# Altium PCB CDH_PCB_reva01.PcbDoc (part 1 of 2)
Units mil, origin at the board's own origin, x right, y up, seen from the top; angles counter-clockwise.
Board outline 4760 x 6365 mil, 4 copper layers (Component Side, Ground Plane, Power Plane, Solder Side), stack 60.8 mil thick; 111 components, 99 nets, 581 pads, 205 vias.
Unrouted connection lines stored in the file: 7.
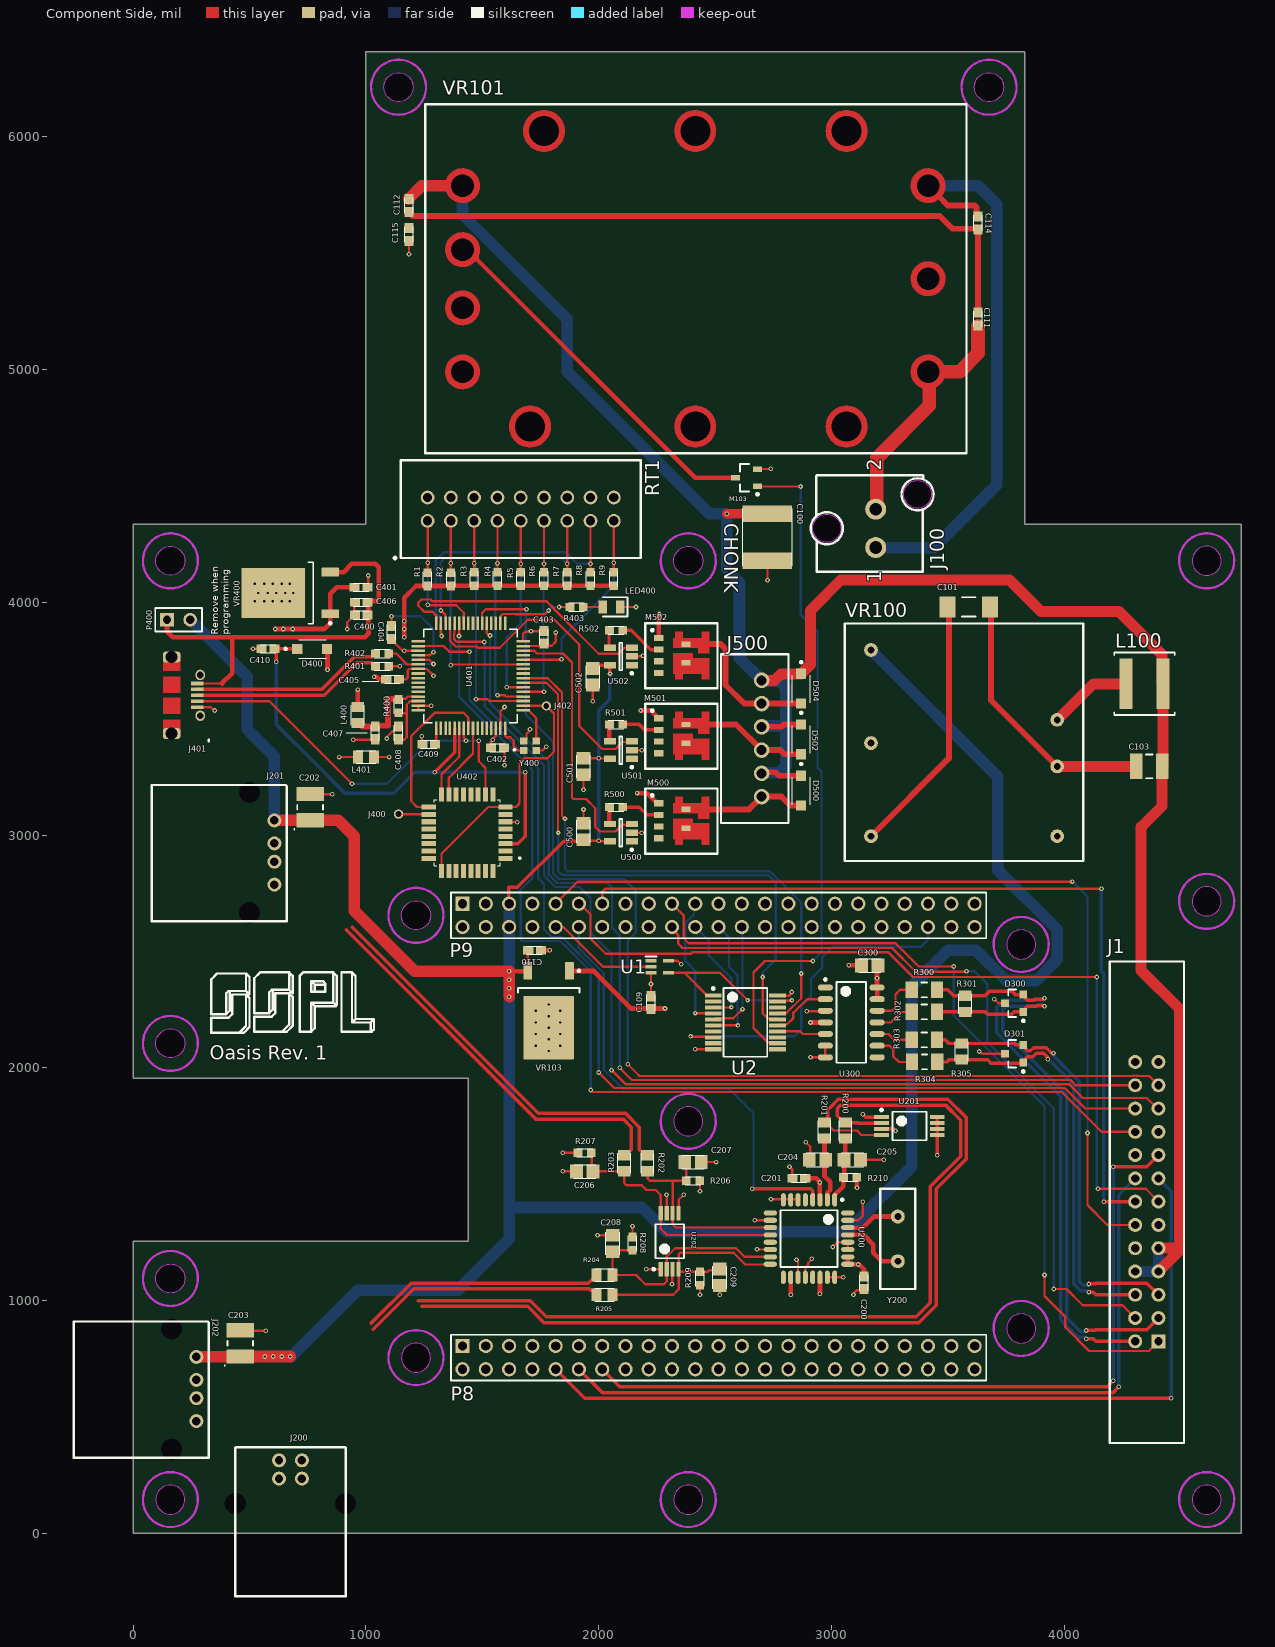
[diagram p0: Component Side view]
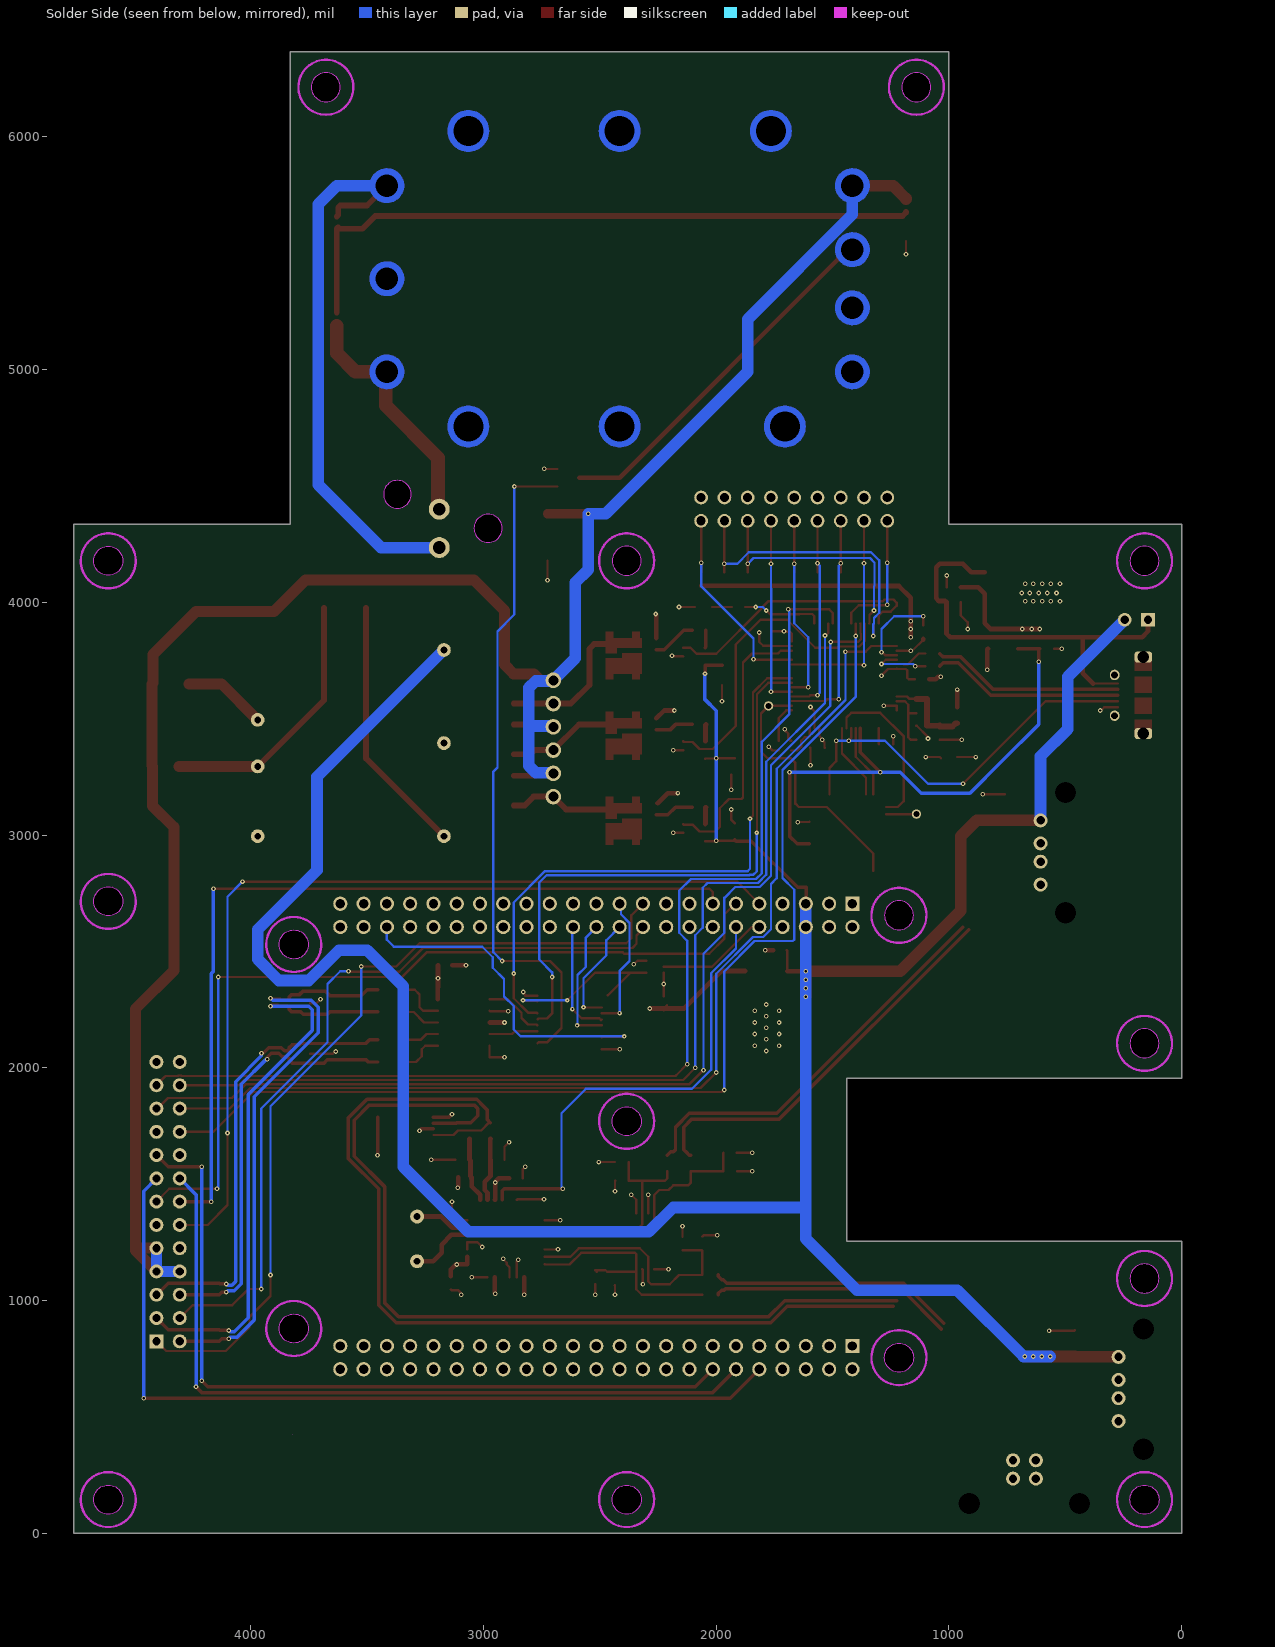
[diagram p1: Solder Side view, seen from below]
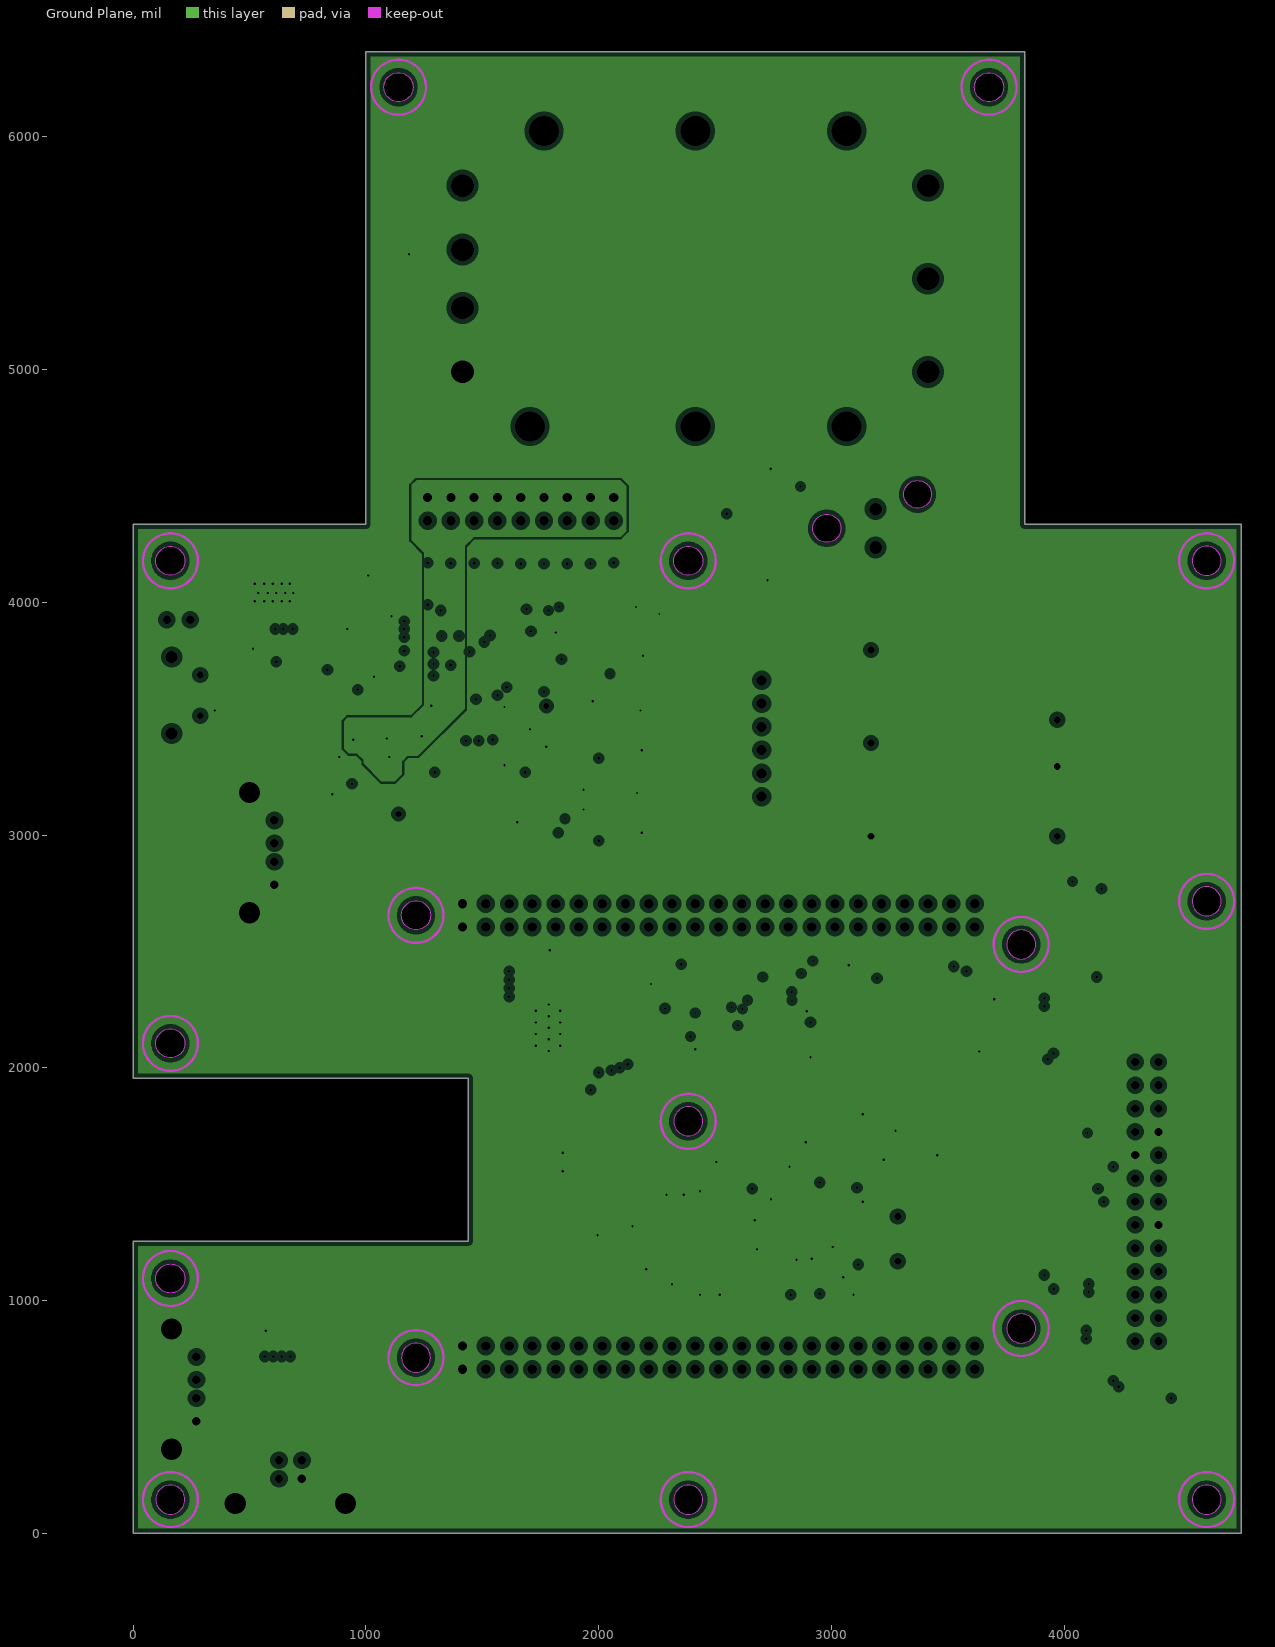
[diagram p2: Ground Plane, clearances drawn from the general rule]
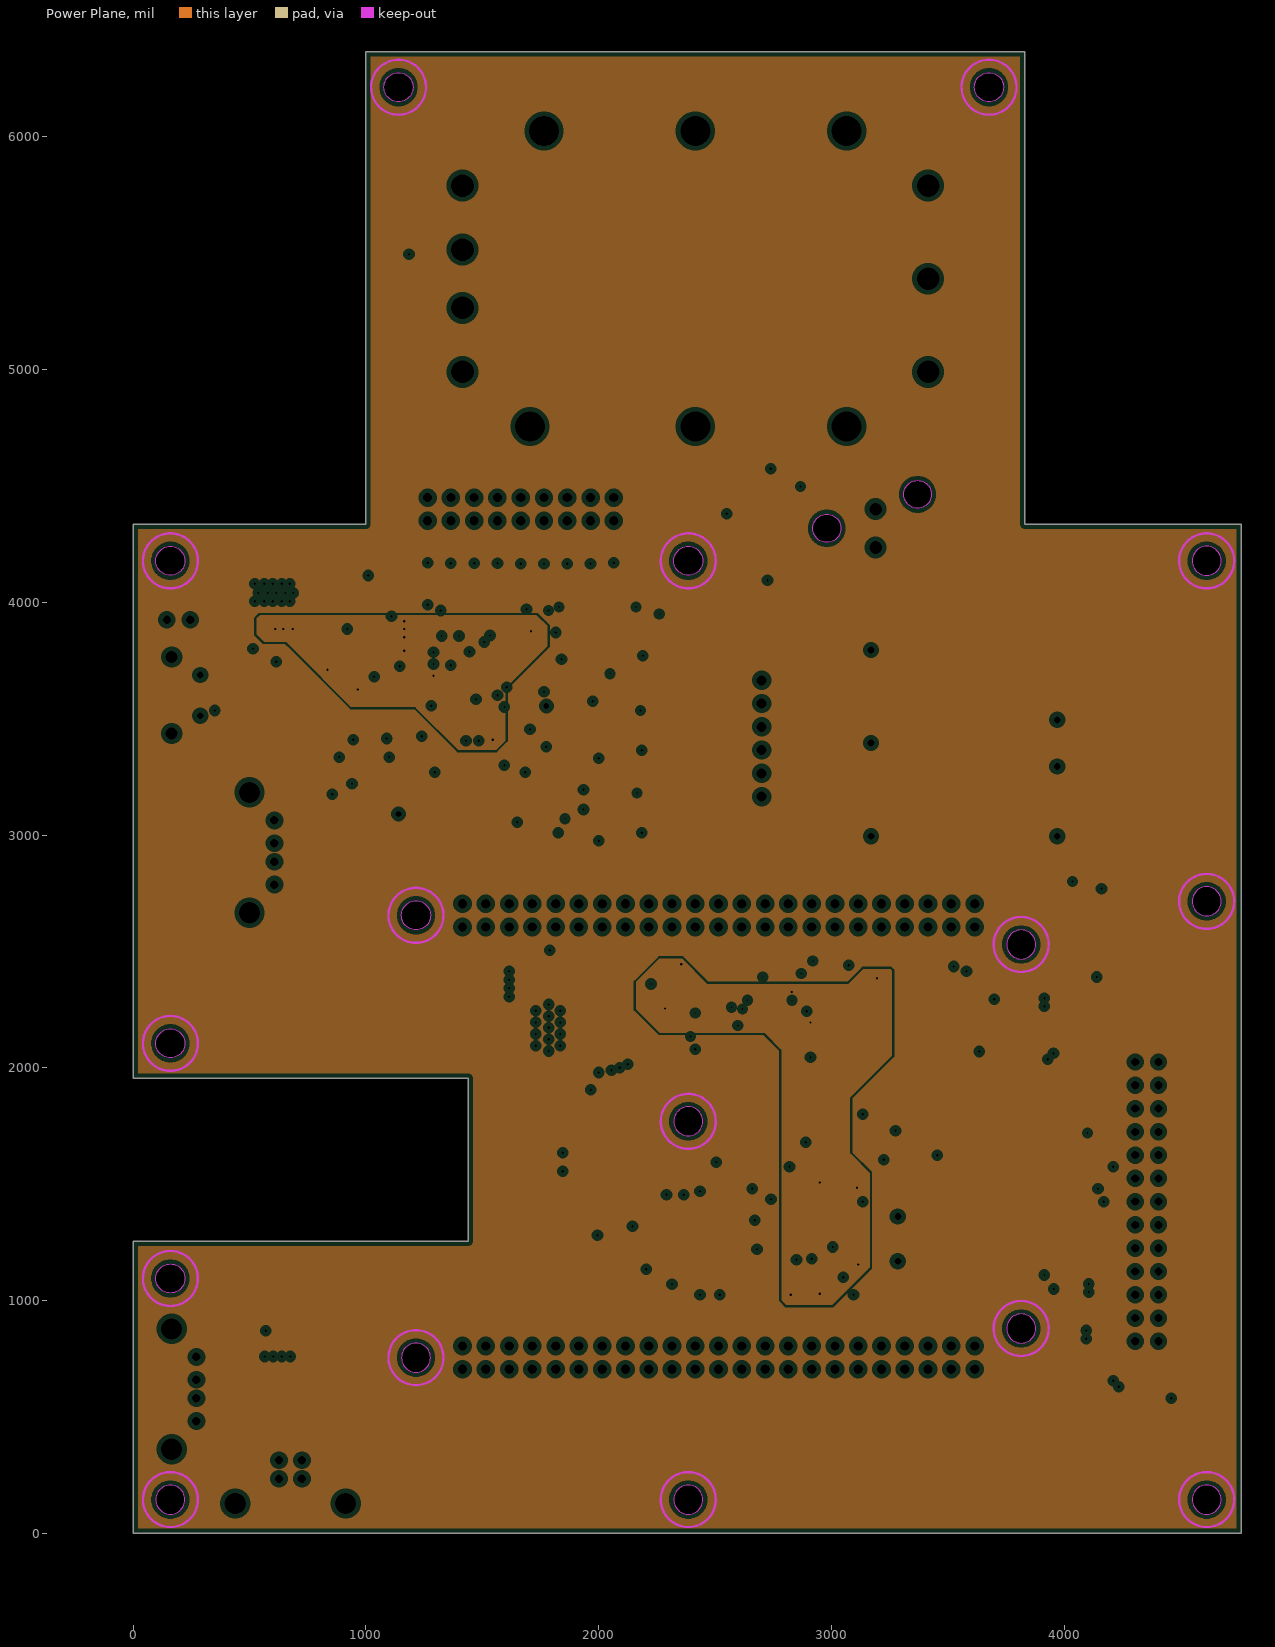
[diagram p3: Power Plane, clearances drawn from the general rule]
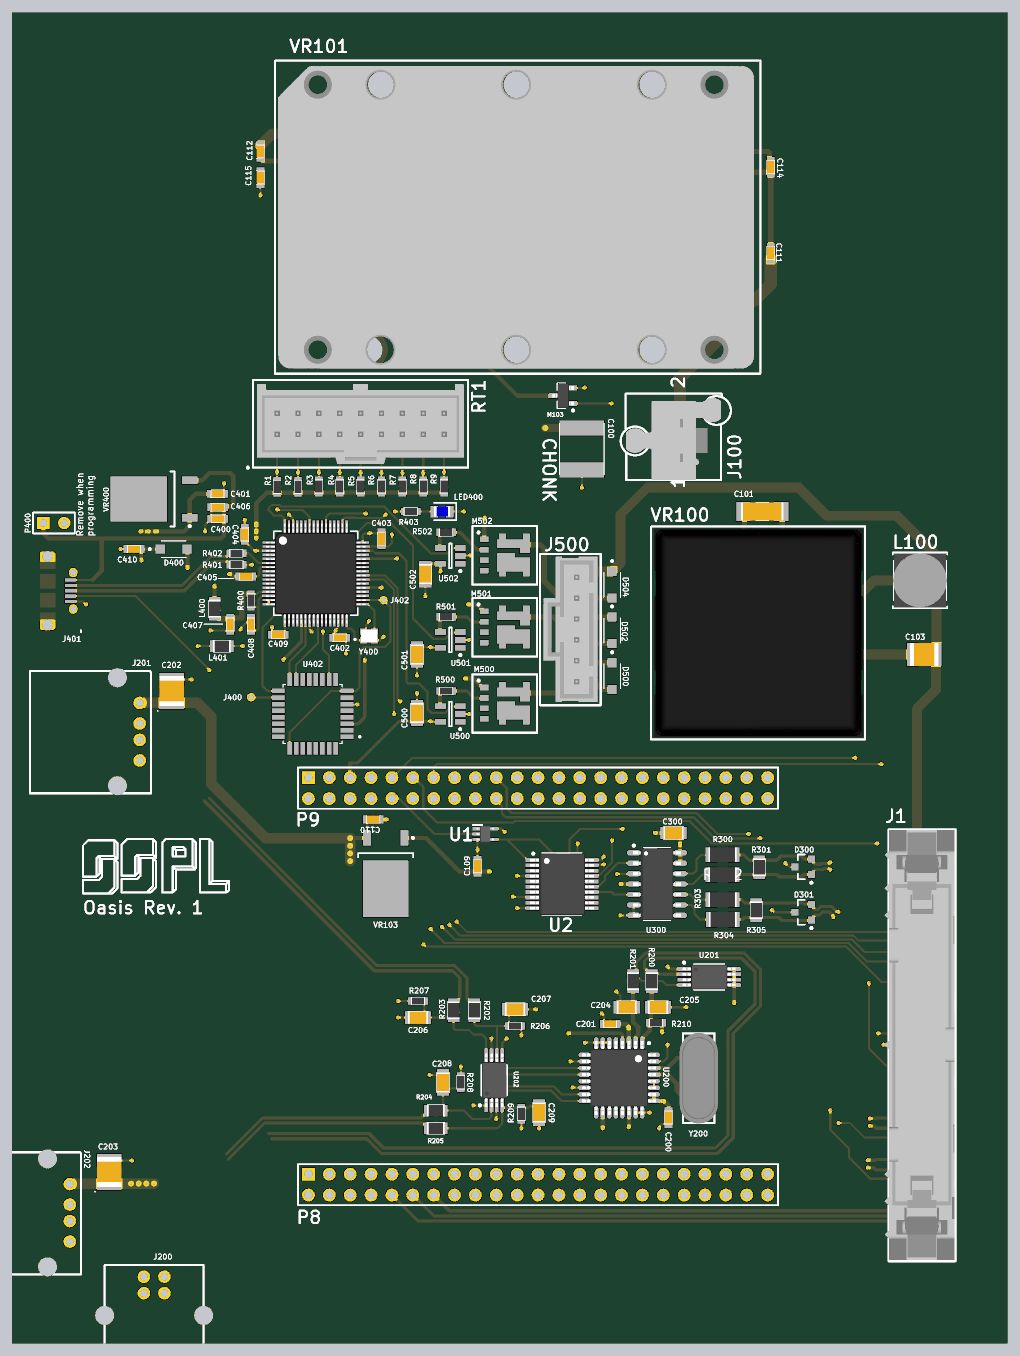
[diagram p5: 3D render of the assembled board from above, using the file's embedded part models]

## Layer stack, top to bottom
Top Solder: solder mask 0.4, Solder Resist, Dk 3.5
Component Side: signal copper 1.4
Dielectric 1: core 7.6, FR-4, Dk 4.8
Ground Plane: plane copper 1.4, net (Multiple Nets)
Dielectric 3: prepreg 40, Dk 4.2
Power Plane: plane copper 1.4, net (Multiple Nets)
Dielectric 4: core 7.6, FR-4, Dk 4.8
Solder Side: signal copper 1.4
Bottom Solder: solder mask 0.4, Solder Resist, Dk 3.5

## Board outline
0,0 0,1255 1440,1255 1440,1955 0,1955 0,4335 1000,4335 1000,6365 3830,6365 3830,4335 4760,4335 4760,0
cut-out: 1140,6150.5 cw(c1140,6213) 1077.5,6213 cw(c1140,6213) 1140,6275.5 cw(c1140,6213) 1202.5,6213 cw(c1140,6213)
cut-out: 3677,6150.5 cw(c3677,6213) 3614.5,6213 cw(c3677,6213) 3677,6275.5 cw(c3677,6213) 3739.5,6213 cw(c3677,6213)
cut-out: 4549.5,4178 ccw(c4612,4178) 4612,4115.5 ccw(c4612,4178) 4674.5,4178 ccw(c4612,4178) 4612,4240.5 ccw(c4612,4178)
cut-out: 2385,4115.5 cw(c2385,4178) 2322.5,4178 cw(c2385,4178) 2385,4240.5 cw(c2385,4178) 2447.5,4178 cw(c2385,4178)
cut-out: 160,4115.5 cw(c160,4178) 97.5,4178 cw(c160,4178) 160,4240.5 cw(c160,4178) 222.5,4178 cw(c160,4178)
cut-out: 1215,2592.5 cw(c1215,2655) 1152.5,2655 cw(c1215,2655) 1215,2717.5 cw(c1215,2655) 1277.5,2655 cw(c1215,2655)
cut-out: 160,2042.5 cw(c160,2105) 97.5,2105 cw(c160,2105) 160,2167.5 cw(c160,2105) 222.5,2105 cw(c160,2105)
cut-out: 2322.5,1770 ccw(c2385,1770) 2385,1707.5 ccw(c2385,1770) 2447.5,1770 ccw(c2385,1770) 2385,1832.5 ccw(c2385,1770)
cut-out: 4549.5,2715 ccw(c4612,2715) 4612,2652.5 ccw(c4612,2715) 4674.5,2715 ccw(c4612,2715) 4612,2777.5 ccw(c4612,2715)
cut-out: 3752.5,2530 ccw(c3815,2530) 3815,2467.5 ccw(c3815,2530) 3877.5,2530 ccw(c3815,2530) 3815,2592.5 ccw(c3815,2530)
cut-out: 3752.5,880 ccw(c3815,880) 3815,817.5 ccw(c3815,880) 3877.5,880 ccw(c3815,880) 3815,942.5 ccw(c3815,880)
cut-out: 4549.5,145 ccw(c4612,145) 4612,82.5 ccw(c4612,145) 4674.5,145 ccw(c4612,145) 4612,207.5 ccw(c4612,145)
cut-out: 2322.5,145 ccw(c2385,145) 2385,82.5 ccw(c2385,145) 2447.5,145 ccw(c2385,145) 2385,207.5 ccw(c2385,145)
cut-out: 1152.5,755 ccw(c1215,755) 1215,692.5 ccw(c1215,755) 1277.5,755 ccw(c1215,755) 1215,817.5 ccw(c1215,755)
cut-out: 160,1032.5 cw(c160,1095) 97.5,1095 cw(c160,1095) 160,1157.5 cw(c160,1095) 222.5,1095 cw(c160,1095)
cut-out: 97.5,145 ccw(c160,145) 160,82.5 ccw(c160,145) 222.5,145 ccw(c160,145) 160,207.5 ccw(c160,145)
cut-out: 3310.49,4464 cw(c3370,4464) 3370,4523.51 cw(c3370,4464) 3429.51,4464 cw(c3370,4464) 3370,4404.49 cw(c3370,4464)
cut-out: 2919.1,4318 cw(c2980,4318) 2980,4378.9 cw(c2980,4318) 3040.9,4318 cw(c2980,4318) 2980,4257.1 cw(c2980,4318)
cut-out: 4595,2777.5
cut-out: 3820,425

## Design rules (kind name [scope] priority, off if disabled: settings)
Clearance [All] p1: gap=7 ignorepadtopadclearanceinfootprint=TRUE except(0: Arc-Hole Track-Hole SMDPad-Hole THPad-Hole Via-Hole Fill-Hole Poly-Hole Region-Hole Text-Hole)
DiffPairsRouting [All] p1: maxlimit=10 minlimit=10 mostfreqgap=10 toplayer_minwidth=10 toplayer_maxwidth=15 toplayer_prefwidth=15 bottomlayer_minwidth=10 bottomlayer_maxwidth=15 bottomlayer_prefwidth=15 maxuncoupledlength=500
Height [All] p1: minheight=0 maxheight=1500 prefheight=500
MatchedLengths MatchedLengths_USB_DiffPairs [All] p1: tolerance=150 checknetsindiffpair=TRUE checkdiffpairvsdiffpair=FALSE checkxsignals=FALSE checkothers=FALSE
MaxMinImpedance "Schematic Impedance Constraint_11" [InNet('RS422-Rx_P')] p1: minimum=90.00 maximum=110.0
MaxMinImpedance "Schematic Impedance Constraint_10" [InNet('RS422-Rx_N')] p2: minimum=90.00 maximum=110.0
MaxMinImpedance "Schematic Impedance Constraint_9" [InNet('RS422-Tx_P')] p3: minimum=90.00 maximum=110.0
MaxMinImpedance "Schematic Impedance Constraint_8" [InNet('RS422-Tx_N')] p4: minimum=90.00 maximum=110.0
MaxMinImpedance "Schematic Impedance Constraint_7" [InNet('USB_1_P')] p5: minimum=40.50 maximum=49.50
MaxMinImpedance "Schematic Impedance Constraint_6" [InNet('USB_1_N')] p6: minimum=40.50 maximum=49.50
MaxMinImpedance "Schematic Impedance Constraint_5" [InNet('USB_2_P')] p7: minimum=40.50 maximum=49.50
MaxMinImpedance "Schematic Impedance Constraint_4" [InNet('USB_0_N')] p8: minimum=40.50 maximum=49.50
MaxMinImpedance "Schematic Impedance Constraint_3" [InNet('TEENSY_USB_P')] p9: minimum=40.50 maximum=49.50
MaxMinImpedance "Schematic Impedance Constraint_2" [InNet('TEENSY_USB_N')] p10: minimum=40.50 maximum=49.50
MaxMinImpedance "Schematic Impedance Constraint_1" [InNet('USB_2_N')] p11: minimum=40.50 maximum=49.50
MaxMinImpedance "Schematic Impedance Constraint" [InNet('USB_0_P')] p12: minimum=40.50 maximum=49.50
MinimumAnnularRing [All] p1: minimumring=5
MinimumSolderMaskSliver [All] p1: minsoldermaskwidth=1
PlaneClearance [All] p1: clearance=20
PlaneConnect [All] p1: pad.planeconnectstyle=Relief pad.reliefexpansion=20 pad.reliefentries=4 pad.reliefconductorwidth=10 pad.reliefairgap=10 via.planeconnectstyle=Direct via.reliefexpansion=20 via.reliefentries=4 via.reliefconductorwidth=10 via.reliefairgap=10
PolygonConnect [All] p1: connectstyle=Relief reliefconductorwidth=10 reliefentries=4 polygonreliefangle="90 Angle" airgapwidth=10
RoutingVias [All] p1: holewidth=8 width=20 viastyle="Through Hole" minholewidth=8 minwidth=20 maxholewidth=8 maxwidth=20
SilkToSilkClearance [All] p1: silktosilkclearance=1
SilkToSolderMaskClearance [IsPad] p1: minsilkscreentomaskgap=0 clearancetoexposedcopper=TRUE
SolderMaskExpansion [All] p1: expansion=4 istentingtop=FALSE
Width "Schematic Width Constraint" [InNet('GND_48V')] p1: maxlimit=100 minlimit=59 preferedwidth=60 minimp=50.000000 maximp=50.000000 favimp=50.000000
Width [All] p2: maxlimit=100 minlimit=10 preferedwidth=10
23 further rules are at their usual default settings.

## Classes and differential pairs
net class 500_HEATERS_Nets: +5 +28 GND NetD500_2 NetD502_2 NetD504_2 NetM500_4 NetM500_G1 NetM501_4 NetM501_G1 NetM502_4 NetM502_G1 NetR500_1 NetR501_1 NetR502_1 NetU401_46 NetU401_61 NetU401_64 NetU500_1 NetU501_1 NetU502_1
component class 500_HEATERS: C500 C501 C502 D500 D502 D504 J500 M500 M501 M502 R500 R501 R502 U500 U501 U502
net class 400_TEENSY_Nets: +5 GND NetC400_1 NetC407_1 NetC407_2 NetC408_1 NetC409_2 NetC410_1 NetJ1_20 NetJ1_21 NetJ1_22 NetJ1_23 NetJ1_24 NetJ400_1 NetJ401_4 NetJ402_1 NetLED400_2 NetR1_1 NetR2_1 NetR3_1 NetR4_1 NetR5_2 NetR6_1 NetR7_1 NetR8_1 NetR9_1 NetR401_1 NetR402_1 NetR403_2 NetU2_16 NetU2_17 NetU401_22 NetU401_24 NetU401_25 NetU401_32 NetU401_33 NetU401_46 NetU401_61 NetU401_64 TEENSY_USB_N TEENSY_USB_P TN_3V3
net class 300_CDH_RS422_Nets: 3V3 GND NetR300_1 NetR302_1 NetR303_1 NetR304_1 NetU2_14 NetU2_15 RS422-Rx_N RS422-Rx_P RS422-Tx_N RS422-Tx_P
net class 200_CDH_USB_2_Hub_Nets: 3V3 +5 GND NetC204_1 NetC205_1 NetC206_1 NetC207_1 NetC208_2 NetC209_2 NetP9_12 NetU200_29 NetU200_30 USB_0_N USB_0_P USB_1_N USB_1_P USB_2_N USB_2_P
net class 100_POWER_Nets: 3V3 +5 +28 +48 GND GND_48V GND_BASEPLATE NetL100_2 NetM103_1 NetM103_3
net class 000_BBB_Pinouts_Nets: 3V3 +5 +28 GND NetC407_2 NetJ1_1 NetJ1_4 NetJ1_12 NetJ1_13 NetJ1_14 NetJ1_15 NetJ1_16 NetJ1_17 NetJ1_20 NetJ1_21 NetJ1_22 NetJ1_23 NetJ1_24 NetM103_1 NetP9_10 NetP9_12 NetP9_21 NetP9_22 NetP9_24 NetP9_26 NetP9_42 NetR1_1 NetR2_1 NetR3_1 NetR4_1 NetR5_2 NetR6_1 NetR7_1 NetR8_1 NetR9_1 NetU1_4 NetU2_14 NetU2_15 NetU2_16 NetU2_17 RS422-Rx_N RS422-Rx_P RS422-Tx_N RS422-Tx_P TN_3V3
component class 400_TEENSY: C400 C401 C402 C403 C404 C405 C406 C407 C408 C409 C410 D400 J400 J401 J402 L400 L401 LED400 P400 R400 R401 R402 R403 U401 U402 VR400 Y400
component class 100_POWER: C100 C101 C103 C109 C110 C111 C112 C114 C115 J100 L100 M103 VR100 VR101 VR103
component class 300_CDH_RS422: * C300 D300 D301 R300 R301 R302 R303 R304 R305 U300
component class 200_CDH_USB_2_Hub: C200 C201 C202 C203 C204 C205 C206 C207 C208 C209 J200 J201 J202 R200 R201 R202 R203 R204 R205 R206 R207 R208 R209 R210 U200 U201 U202 Y200
component class 000_BBB_Pinouts: J1 P8 P9 R1 R2 R3 R4 R5 R6 R7 R8 R9 RT1 U1 U2
differential pair USB_0: +USB_0_P -USB_0_N
differential pair USB_2: +USB_2_P -USB_2_N
differential pair USB_1: +USB_1_P -USB_1_N
differential pair TEENSY_USB: +TEENSY_USB_P -TEENSY_USB_N
differential pair RS422-Tx: +RS422-Tx_P -RS422-Tx_N
differential pair RS422-Rx: +RS422-Rx_P -RS422-Rx_N

## Components (designator, comment, footprint, x,y, rotation, side; value= is the part's Value field where it differs from the comment)
C100 "0.2uF Capactor, high voltage" CAA572C0G2J204J640LH 2730,4279.61 r90 top value=0.2uF
C101 "680pF Cap" Imperial1808_CAP 3590,3980 r180 top value=680pF
C103 "10uF Capacitor" Imperial1210_Cap 4365,3295 r0 top value=10uF
C109 "1 uF Capacitor" IMPERIAL0603_Capacitor 2225,2280 r270 top value=1uF
C110 "1 uF Capacitor" IMPERIAL0603_Capacitor 1725,2505 r180 top value=1uF
C111 "4.7nF Capacitor" IMPERIAL0603_Capacitor 3630,5217.56 r90 top value=4.7nF
C112 "4.7nF Capacitor" IMPERIAL0603_Capacitor 1185,5705 r270 top value=4.7nF
C114 "4.7nF Capacitor" IMPERIAL0603_Capacitor 3630,5630 r90 top value=4.7nF
C115 "4.7nF Capacitor" IMPERIAL0603_Capacitor 1185,5580 r90 top value=4.7nF
C200 "100pF Capacitor" IMPERIAL0603_Capacitor 3140,1076.46 r90 top value=100pF
C201 "100pF Capacitor" IMPERIAL0603_Capacitor 2860,1525 r180 top value=100pF
C202 "F910J107MBAAJ6" POLAR_CAP_SMD_EIA2010 760,3120 r90 top value=100uF
C203 "F910J107MBAAJ6" POLAR_CAP_SMD_EIA2010 460,816.1 r90 top value=100uF
C204 "22pF capacitor" IMPERIAL0805_CAPACITOR 2940,1605 r180 top value=22pF
C205 "22pF capacitor" IMPERIAL0805_CAPACITOR 3090,1605 r0 top value=22pF
C206 "22pF capacitor" IMPERIAL0805_CAPACITOR 1940,1555 r180 top value=22pF
C207 "22pF capacitor" IMPERIAL0805_CAPACITOR 2405,1595 r0 top value=22pF
C208 "22pF capacitor" IMPERIAL0805_CAPACITOR 2060,1245 r270 top value=22pF
C209 "22pF capacitor" IMPERIAL0805_CAPACITOR 2520,1100 r90 top value=22pF
C300 "0.2uF Capacitor" IMPERIAL0805_CAPACITOR 3164.49,2440 r180 top value=0.2uF
C400 "2.2uF Capacitor" IMPERIAL0603_Capacitor 980,3945 r180 top value=2.2uF
C401 "2.2uF Capacitor" IMPERIAL0603_Capacitor 979.29,4065 r0 top value=2.2uF
C402 "2.2uF Capacitor" IMPERIAL0603_Capacitor 1565,3375 r0 top value=2.2uF
C403 "0.1uF Capactor" IMPERIAL0603_Capacitor 1765,3850 r270 top value=0.1uF
C404 "0.1uF Capactor" IMPERIAL0603_Capacitor 1110,3870 r90 top value=0.1uF
C405 "0.1uF Capactor" IMPERIAL0603_Capacitor 1115,3669 r180 top value=0.1uF
C406 "2.2uF Capacitor" IMPERIAL0603_Capacitor 980,4000 r180 top value=2.2uF
C407 "2.2uF Capacitor" IMPERIAL0603_Capacitor 1040,3439 r270 top value=2.2uF
C408 "0.1uF Capactor" IMPERIAL0603_Capacitor 1140,3439 r90 top value=0.1uF
C409 "0.1uF Capactor" IMPERIAL0603_Capacitor 1270,3390 r0 top value=0.1uF
C410 "0.1uF Capactor" IMPERIAL0603_Capacitor 579.29,3800 r180 top value=0.1uF
C500 "10uF Capacitor" IMPERIAL0805_CAPACITOR 1935,3015 r270 top value=10uF
C501 "10uF Capacitor" IMPERIAL0805_CAPACITOR 1935,3294.57 r90 top value=10uF
C502 "10uF Capacitor" IMPERIAL0805_CAPACITOR 1975,3680 r90 top value=10uF
D300 "CDSOT23-SM712" BOUR-SOT23-3_V 3785,2277.4 r180 top
D301 "CDSOT23-SM712" BOUR-SOT23-3_V 3785,2060 r180 top
D400 "STPS1L40ZF" *SODFL3718X108N 769.76,3800 r0 top
D500 "STPS1L40ZF" *SODFL3718X108N 2870,3190.24 r270 top
D502 "STPS1L40ZF" *SODFL3718X108N 2870,3410 r270 top
D504 "STPS1L40ZF" *SODFL3718X108N 2870,3627.99 r270 top
J1 "TE_5499922-6" TE_5499922-6 4355,1425 r90 top
J100 "LaserHeader" "MOLEX 2X1 LATCH HEADER" 3190,4235 r90 top
J200 "USB_B_FEMALE" USB_B_FEMALE_RT 675.79,235 r0 top
J201 "USB_A_FEMALE" USB_A_FEMALE_SINGLE 500,2925 r270 top
J202 "USB_A_FEMALE" USB_A_FEMALE_SINGLE 165,620 r270 top
J400 "Prog. Pad" PAD_40x25 1140,3090 r0 top value=DNI
J401 "" uUSB_Padsonly 61.57,3800.28 r270 top value=DNI
J402 "Reset Pad" PAD_40x25 1775,3555 r90 top value=DNI
J500 "Molex 171971-0006" "MOLEX 6x1 latch header" 2800.39,3066.58 r90 top
L100 "1.1uH Inductor" XAL6020-112ME_ 4345,3650 r180 top value="1.1 uH"
L400 "Ferritde, 600 Ohm Impedence" Imperial0805_RES 965,3515 r90 top value="600 Ohm"
L401 "Ferritde, 600 Ohm Impedence" Imperial0805_RES 1000,3335 r180 top value="600 Ohm"
LED400 "SML-211DTT86" LEDC2012X90N 2055,3980 r180 top
M103 "BSS138LT7G" SOT95P245X110-3N 2635,4535 r180 top
M500 "NPN MOSFET" "PowerPAK SO-8L DUAL ASYMMETRIC" 2200.39,3200.08 r270 top
M501 "NPN MOSFET" "PowerPAK SO-8L DUAL ASYMMETRIC" 2200.39,3564.76 r270 top
M502 "NPN MOSFET" "PowerPAK SO-8L DUAL ASYMMETRIC" 2200.39,3910.08 r270 top
P8 "FEMALE HEADER 2x23" MAJOR-TSHC-123-D-03_V_FLIPPED 2515,755 r0 top locked
P9 "FEMALE HEADER 2x23" MAJOR-TSHC-123-D-03_V_FLIPPED 2515,2655 r0 top locked
P400 "Header 2" HDR1X2 145,3925 r0 top
R1 "10K Resistor" Imperial0603_RES 1265,4098.54 r270 top value=10K
R2 "10K Resistor" Imperial0603_RES 1365,4098.54 r270 top value=10K
R3 "10K Resistor" Imperial0603_RES 1465,4100 r270 top value=10K
R4 "10K Resistor" Imperial0603_RES 1565,4100 r270 top value=10K
R5 "10K Resistor" Imperial0603_RES 1665,4100 r90 top value=10K
R6 "10K Resistor" Imperial0603_RES 1765,4100 r270 top value=10K
R7 "10K Resistor" Imperial0603_RES 1865,4100 r270 top value=10K
R8 "10K Resistor" Imperial0603_RES 1965,4100 r270 top value=10K
R9 "10K Resistor" Imperial0603_RES 2065,4100 r270 top value=10K
R200 "27 Ohm Resistor" Imperial0805_RES 3060,1730 r270 top value=27
R201 "27 Ohm Resistor" Imperial0805_RES 2970,1730 r270 top value=27
R202 "27 Ohm Resistor" Imperial0805_RES 2210,1590 r90 top value=27
R203 "27 Ohm Resistor" Imperial0805_RES 2110,1590 r90 top value=27
R204 "27 Ohm Resistor" Imperial0805_RES 2025,1110 r180 top value=27
R205 "27 Ohm Resistor" Imperial0805_RES 2025,1025 r180 top value=27
R206 "15KOhm Resistor" Imperial0603_RES 2405,1515 r0 top value=15K
R207 "15KOhm Resistor" Imperial0603_RES 1940,1635 r180 top value=15K
R208 "15KOhm Resistor" Imperial0603_RES 2145,1245 r270 top value=15K
R209 "15KOhm Resistor" Imperial0603_RES 2435,1095 r90 top value=15K
R210 "1.5KOhm Resistor" Imperial0603_RES 3080,1530 r0 top value=1.5K
R300 "10 Ohm Resistor" Imperial1206_RES 3399.13,2335 r0 top value=10
R301 "100 Ohm Resistor" Imperial0805_RES 3575,2275 r270 top value=100
R302 "10 Ohm Resistor" Imperial1206_RES 3399.13,2240 r0 top value=10
R303 "10 Ohm Resistor" Imperial1206_RES 3399.13,2120 r0 top value=10
R304 "10 Ohm Resistor" Imperial1206_RES 3400,2025 r0 top value=10
R305 "100 Ohm Resistor" Imperial0805_RES 3560,2070 r90 top value=100
R400 "470 Ohm Resistor" Imperial0603_RES 1140,3554 r90 top value=470
R401 "33 Ohm Resistor" Imperial0603_RES 1070,3725 r180 top value=33
R402 "33 Ohm Resistor" Imperial0603_RES 1070,3780 r180 top value=33
R403 "470 Ohm Resistor" Imperial0603_RES 1905,3980 r180 top value=470
R500 "CRCW0603100RFKEAC" Imperial0603_RES 2075,3120 r0 top value=100
R501 "CRCW0603100RFKEAC" Imperial0603_RES 2075,3475 r0 top value=100
R502 "CRCW0603100RFKEAC" Imperial0603_RES 2075,3880 r0 top value=100
RT1 "Thermisters" "MOLEX 90130-1118" 1265,4350 r0 top
U1 "single gate inverter" SOT65P210X110-5N 2262.6,2434.41 r0 top
U2 "Tristate buffer" SOP65P780X200-20N 2630,2195 r0 top
U200 "TUSB2046B_VF_32" TQFP80P900X900X160-32N 2903.74,1266.34 r270 top value=Value
U201 "SN65240PWR" PW0008A_M 3335,1750 r0 top
U202 "SN65240PWR" PW0008A_M 2305,1255 r90 top
U300 "SN65HVD1470D" SOIC127P590X175-14M 3085,2195 r0 top
U401 "MK20DX256VLH7" *QFP50P1200X1200X160-64N 1450,3684 r0 top
U402 "MKL04Z32" *QFP80P900X900X160-32N 1435,3010 r180 top
U500 "LTC1981ES5#TRMPBF" LT-S5-5-SOT-23_M 2095,3010 r180 top
U501 "LTC1981ES5#TRMPBF" LT-S5-5-SOT-23_M 2095,3365 r180 top
U502 "LTC1981ES5#TRMPBF" LT-S5-5-SOT-23_M 2095,3767.4 r180 top
VR100 "28 to 5V switching converter" "THN 30-2411WI-A1" 3570,3395 r270 top locked
VR101 "V24C28C50BL" V24C48C50BL_tht 3555,4665 r90 top locked
VR103 "LP38691DT-3.3/NOPB" NDP0003B_N 1785,2245 r270 top
VR400 "LP38691DT-3.3/NOPB" NDP0003B_N 675,4040 r180 top
Y200 "ATS060C-E" "HC-49/US T/H Crystal" 3285,1265 r270 top
Y400 "ECS-160-10-37-JTN-TR" XTAL_ECS-160-10-37-RWM-TR 1705,3384 r0 top

## Footprints (in the part's own frame and the unit in brackets; to place one, negate y for a bottom-side part, rotate by r counter-clockwise, add the part's x,y. Pads: shape width x height; smd on the part's side, far side on the other; paste and mask are expansions set on the pad)
*QFP50P1200X1200X160-64N [mil]
  rect 58x11 smd: 1(-225,148) 2(-225,128) 3(-225,108) 4(-225,89) 5(-225,69) 6(-225,49) 7(-225,30) 8(-225,10) 9(-225,-10) 10(-225,-30) 11(-225,-49) 12(-225,-69) 13(-225,-89) 14(-225,-108) 15(-225,-128) 16(-225,-148) 33(225,-148) 34(225,-128) 35(225,-108) 36(225,-89) 37(225,-69) 38(225,-49) 39(225,-30) 40(225,-10) 41(225,10) 42(225,30) 43(225,49) 44(225,69) 45(225,89) 46(225,108) 47(225,128) 48(225,148)
  rect 11x58 smd: 17(-148,-225) 18(-128,-225) 19(-108,-225) 20(-89,-225) 21(-69,-225) 22(-49,-225) 23(-30,-225) 24(-10,-225) 25(10,-225) 26(30,-225) 27(49,-225) 28(69,-225) 29(89,-225) 30(108,-225) 31(128,-225) 32(148,-225) 49(148,225) 50(128,225) 51(108,225) 52(89,225) 53(69,225) 54(49,225) 55(30,225) 56(10,225) 57(-10,225) 58(-30,225) 59(-49,225) 60(-69,225) 61(-89,225) 62(-108,225) 63(-128,225) 64(-148,225)
  silkscreen extent -201,-201 201,201, body extent -239,-240 239,238, height 64
*QFP80P900X900X160-32N [mm]
  rect 1.56x0.55 smd: 1(-4.18,2.8) 2(-4.18,2) 3(-4.18,1.2) 4(-4.18,0.4) 5(-4.18,-0.4) 6(-4.18,-1.2) 7(-4.18,-2) 8(-4.18,-2.8) 17(4.18,-2.8) 18(4.18,-2) 19(4.18,-1.2) 20(4.18,-0.4) 21(4.18,0.4) 22(4.18,1.2) 23(4.18,2) 24(4.18,2.8)
  rect 0.55x1.56 smd: 9(-2.8,-4.18) 10(-2,-4.18) 11(-1.2,-4.18) 12(-0.4,-4.18) 13(0.4,-4.18) 14(1.2,-4.18) 15(2,-4.18) 16(2.8,-4.18) 25(2.8,4.18) 26(2,4.18) 27(1.2,4.18) 28(0.4,4.18) 29(-0.4,4.18) 30(-1.2,4.18) 31(-2,4.18) 32(-2.8,4.18)
  silkscreen extent -5.84,-3.6 3.6,3.6, body extent -3.56,-3.56 3.56,3.56, height 0.76
*SODFL3718X108N [mm]
  rect 1.12x1.08 smd: A(1.6,0) C(-1.645,0)
  silkscreen extent -3.04,-1 1.5,1, body extent -1.52,-1.02 1.52,1.02, height 0.97
BOUR-SOT23-3_V [mm] "SOT23, 3-Leads, Body 2.9x1.3mm, Pitch 0.95mm"
  rect 0.85x0.85 smd: 1(-1,0.95) 2(-1,-0.95) 3(1,0)
  silkscreen extent -1.13,-1.5 0.65,2.05, body extent -0.65,-1.45 0.65,1.45, height 1.17
CAA572C0G2J204J640LH [mm] "2220 Footprint for CAA572C0G2J204J640LH"
  rect 1.81x5.41 smd: 1(-2.55,0.127) 2(2.55,0.127)
  silkscreen extent -3.1,-2.57 3.1,2.83
"HC-49/US T/H Crystal" [mil]
  round 60 hole 30: 1(-96.06,0) 2(96.06,0)
  silkscreen extent -215,-75 215,75, body extent -218,-92 218,92, height 161
HDR1X2 [mm] "Connector; Header; 2 Position"
  rect 1.5x1.5 hole 0.9: 1(0,0)
  round 1.5 hole 0.9: 2(2.54,0)
  silkscreen extent -1.27,-1.27 3.81,1.27
IMPERIAL0603_Capacitor [mm]
  rect 1.1x0.95 smd: 1(-0.7,0) 2(0.7,0)
  silkscreen extent -0.85,-0.45 0.85,0.45, body extent -0.85,-0.45 0.85,0.45, height 0.5
Imperial0603_RES [mm] "Imperial 0603 resistor footprint"
  rect 0.95x0.9 smd: 1(-0.725,0) 2(0.725,0)
  silkscreen extent -0.85,-0.45 0.85,0.45, body extent -0.85,-0.45 0.85,0.45, height 0.55
IMPERIAL0805_CAPACITOR [mm] "Chip Capacitor, 2-Leads, Body 2.13x1.27mm, IPC Medium Density"
  rect 1.4x1.5 smd: 1(-0.9,0) 2(0.9,0)
  silkscreen extent -1.23,-0.75 1.22,0.75, body extent -1.22,-0.75 1.22,0.75, height 0.45
Imperial0805_RES [mm] "Imperial 0805 Resistor"
  rect 1.1x1.4 smd: 1(-0.875,0) 2(0.875,0)
  silkscreen extent -1.07,-0.7 1.08,0.7, body extent -1.08,-0.7 1.08,0.7, height 0.6
Imperial1206_RES [mm] "Imperial 1206 Resistor"
  rect 1.35x1.8 smd: 1(-1.375,0) 2(1.375,0)
  silkscreen extent -0.3,-0.8 0.3,0.8, body extent -1.7,-0.9 1.7,0.9, height 0.7
Imperial1210_Cap [mm] "Imperial 1210 MLCC Chip capacitor"
  rect 1.35x2.8 smd: 1(-1.425,0) 2(1.425,0)
  silkscreen extent -0.35,-1.3 0.35,1.3, body extent -1.75,-1.4 1.75,1.4, height 2.8
Imperial1808_CAP [mm] "Imperial 1808 chip capacitor"
  rect 1.75x2.3 smd: 1(-2.3,0) 2(2.3,0)
  silkscreen extent -0.75,-1.05 0.75,1.05, body extent -2.6,-1.1 2.6,1.1, height 2.15
LEDC2012X90N [mm]
  rect 0.9x1.4 smd: 1(-0.95,0) 2(0.95,0)
  silkscreen extent -1.75,-1.05 0.95,1.05, body extent -1,-0.62 1,0.62, height 0.8
LT-S5-5-SOT-23_M [mm] "SOT23, 5-Leads, Body 3x1.75mm, Pitch 0.95mm, IPC Low Density"
  rect 1.3x0.7 smd: 1(-1.2,0.95) 2(-1.2,0) 3(-1.2,-0.95) 4(1.2,-0.95) 5(1.2,0.95)
  silkscreen extent -1.33,-1.5 0.15,1.97, body extent -0.87,-1.5 0.87,1.5, height 1.45
MAJOR-TSHC-123-D-03_V_FLIPPED [mm] "CONN, 46-Leads, Body 58.42x5mm, Pitch 2.54mm"
  rect 1.55x1.55 hole 1.02 paste+0: 1(-27.94,1.27)
  round 1.55 hole 1.02 paste+0: 2(-27.94,-1.27) 3(-25.4,1.27) 4(-25.4,-1.27) 5(-22.86,1.27) 6(-22.86,-1.27) 7(-20.32,1.27) 8(-20.32,-1.27) 9(-17.78,1.27) 10(-17.78,-1.27) 11(-15.24,1.27) 12(-15.24,-1.27) 13(-12.7,1.27) 14(-12.7,-1.27) 15(-10.16,1.27) 16(-10.16,-1.27) 17(-7.62,1.27) 18(-7.62,-1.27) 19(-5.08,1.27) 20(-5.08,-1.27) 21(-2.54,1.27) 22(-2.54,-1.27) 23(0,1.27) 24(0,-1.27) 25(2.54,1.27) 26(2.54,-1.27) 27(5.08,1.27) 28(5.08,-1.27) 29(7.62,1.27) 30(7.62,-1.27) 31(10.16,1.27) 32(10.16,-1.27) 33(12.7,1.27) 34(12.7,-1.27) 35(15.24,1.27) 36(15.24,-1.27) 37(17.78,1.27) 38(17.78,-1.27) 39(20.32,1.27) 40(20.32,-1.27) 41(22.86,1.27) 42(22.86,-1.27) 43(25.4,1.27) 44(25.4,-1.27) 45(27.94,1.27) 46(27.94,-1.27)
  silkscreen extent -29.21,-2.5 29.21,2.5, body extent -29.21,-2.5 29.21,2.5, height 8.51
"MOLEX 2X1 LATCH HEADER" [mil] "2x1 female molex connector for laser"
  round 90 hole 55 paste+0: 1(0,0) 2(165,0)
  silkscreen extent -104,-249 310,279, body extent -104,-203 310,253, height 504
"MOLEX 6x1 latch header" [mm] "Single row, 6 position pin header with positive latch"
  round 1.7 hole 1.09 paste+0: 1(2.5,2.55) 2(5.04,2.55) 3(7.58,2.55) 4(10.12,2.55) 5(12.66,2.55) 6(15.2,2.55)
  silkscreen extent -0.38,-0.38 18.03,6.99, body extent 0,0 17.7,6.6, height 11.8
"MOLEX 90130-1118" [mm] "9x2 male shrouded pin header"
  round 1.5 hole 1 paste+0: 1(0,0) 2(0,2.54) 3(2.54,0) 4(2.54,2.54) 5(5.08,0) 6(5.08,2.54) 7(7.62,0) 8(7.62,2.54) 9(10.16,0) 10(10.16,2.54) 11(12.7,0) 12(12.7,2.54) 15(17.78,0) 16(17.78,2.54) 17(20.32,0) 18(20.32,2.54)
  round 1.5 hole 1: 13(15.24,0) 14(15.24,2.54)
  silkscreen extent -3.68,-4.19 23.24,6.6, body extent -2.44,-3.61 22.76,6.15, height 10.95
NDP0003B_N [mm] "D-PAK, 4-Leads, Body 6.1x6.6mm, Pitch 2.29mm, Lead Span 9.7mm, IPC Medium Density"
  rrect11% 1.9x0.95 smd: 1(-4.35,2.28) 3(-4.35,-2.28)
  rrect2% 6.9x5.5 smd: 4(1.85,0)
  silkscreen extent -4.47,-3.35 -2,3.43, body extent -4.45,-3.35 5.08,3.35, height 2.38
PAD_40x25 [mil] "Single through-hole solder pad"
  round 40 hole 25: 1(0,0)
POLAR_CAP_SMD_EIA2010 [mm] "Polarized SMT capacitor, Imperial 2010 footprint"
  rect 1.55x3 smd: 1(-1.425,0) 2(1.425,0)
  silkscreen extent -2.46,-1.4 0.25,1.76, body extent -1.85,-1.5 1.85,1.5, height 1.1
"PowerPAK SO-8L DUAL ASYMMETRIC" [mm]
  rect 0.59x1.02 smd paste-1 mask-1: D1(2.28,4.435) D2(4.32,4.435)
  rect 0.68x1.02 smd: G1(2.88,1.455) G2(5.42,1.455) S1(1.61,1.455) S2(4.15,1.455)
  Component Side region: 7.874,-1.016
  Component Side region: 0.915,6.985 3.3,6.985 3.3,5.775 2.685,5.775 2.685,3.025 1.625,3.025 1.625,3.255 0.915,3.255 0.915,4.065 1.625,4.065 1.625,6.175 0.915,6.175
  Component Side region: 3.81,6.985 6.115,6.985 6.115,6.175 5.53,6.175 5.53,4.065 6.115,4.065 6.115,3.255 5.53,3.255 5.53,3.025 3.3,3.025 3.3,5.165 3.81,5.165
  Component Side region: 4.58,5.715
  Component Side region: 4.58,6.35
  silkscreen extent 0,0 7.11,7.87, body extent 1.27,1.4 5.71,6.6, height 1.02
PW0008A_M [mm] "SOP, 8-Leads, Body 4.5x3.1mm, Pitch 0.65mm, IPC Low Density"
  rrect22% 1.6x0.45 smd: 1(-3.05,0.975) 2(-3.05,0.325) 3(-3.05,-0.325) 4(-3.05,-0.975) 5(3.05,-0.975) 6(3.05,-0.325) 7(3.05,0.325) 8(3.05,0.975)
  silkscreen extent -3.17,-1.55 1.85,1.87, body extent -3.23,-1.5 3.23,1.5, height 1.2
SOIC127P590X175-14M [mm] "SOIC, 14-Leads, Body 8.65x3.90mm, Pitch 1.27mm, IPC Low Density"
  oval 1.65x0.65 smd: 1(-2.825,3.81) 2(-2.825,2.54) 3(-2.825,1.27) 4(-2.825,0) 5(-2.825,-1.27) 6(-2.825,-2.54) 7(-2.825,-3.81) 8(2.825,-3.81) 9(2.825,-2.54) 10(2.825,-1.27) 11(2.825,0) 12(2.825,1.27) 13(2.825,2.54) 14(2.825,3.81)
  silkscreen extent -2.95,-4.4 1.6,4.81, body extent -2.95,-4.4 2.95,4.4, height 1.75
SOP65P780X200-20N [mm] "SOP, 20-Leads, Body 7.20x5.30mm, Pitch 0.65mm, IPC Medium Density"
  rect 1.85x0.45 smd: 1(-3.5,2.925) 2(-3.5,2.275) 3(-3.5,1.625) 4(-3.5,0.975) 5(-3.5,0.325) 6(-3.5,-0.325) 7(-3.5,-0.975) 8(-3.5,-1.625) 9(-3.5,-2.275) 10(-3.5,-2.925) 11(3.5,-2.925) 12(3.5,-2.275) 13(3.5,-1.625) 14(3.5,-0.975) 15(3.5,-0.325) 16(3.5,0.325) 17(3.5,0.975) 18(3.5,1.625) 19(3.5,2.275) 20(3.5,2.925)
  silkscreen extent -3.62,-3.75 2.4,3.82, body extent -3.9,-3.75 3.9,3.75, height 2
SOT65P210X110-5N [mm]
  rect 1.2x0.4 smd: 1(-0.95,0.65) 2(-0.95,0) 3(-0.95,-0.65) 4(0.95,-0.65) 5(0.95,0.65)
  silkscreen extent -1.55,1.1 -0.35,1.1, body extent -1.05,-1 1.05,1, height 1.1
SOT95P245X110-3N [mm] "SOT23, 3-Leads, Body 2.92x2.45mm, Pitch 0.95mm, IPC Medium Density"
  rect 1x0.6 smd: 1(-1.2,0.95) 2(-1.2,-0.95) 3(1.2,0)
  silkscreen extent -1.33,-1.5 0.7,1.92, body extent -1.3,-1.52 1.3,1.52, height 1.1
TE_5499922-6 [mil] "AMP-LATCH Universal Headers 26 Pos"
  rect 60x60 hole 35: 1(-600,-50)
  round 60 hole 35: 2(-600,50) 3(-500,-50) 4(-500,50) 5(-400,-50) 6(-400,50) 7(-300,-50) 8(-300,50) 9(-200,-50) 10(-200,50) 11(-100,-50) 12(-100,50) 13(0,-50) 14(0,50) 15(100,-50) 16(100,50) 17(200,-50) 18(200,50) 19(300,-50) 20(300,50) 21(400,-50) 22(400,50) 23(500,-50) 24(500,50) 25(600,-50) 26(600,50)
  silkscreen extent -1037,-160 1032,160, body extent -1030,-156 1030,180, height 1061
"THN 30-2411WI-A1" [mm]
  round 1.5 hole 0.75 paste+0: 1(-2.54,10.16) 2(2.54,10.16) 3(-10.16,-10.16) 4(0,-10.16) 5(10.16,-10.16) 6(10.16,10.16)
  silkscreen extent -13.05,-13.04 12.86,12.99, body extent -12.79,-12.66 12.61,12.74, height 10.2
TQFP80P900X900X160-32N [mm] "TQFP, 32-Leads, Body 7.00x7.00mm, Pitch 0.80mm, IPC Medium Density"
  oval 1.45x0.55 smd: 1(-4.225,2.8) 2(-4.225,2) 3(-4.225,1.2) 4(-4.225,0.4) 5(-4.225,-0.4) 6(-4.225,-1.2) 7(-4.225,-2) 8(-4.225,-2.8) 17(4.225,-2.8) 18(4.225,-2) 19(4.225,-1.2) 20(4.225,-0.4) 21(4.225,0.4) 22(4.225,1.2) 23(4.225,2) 24(4.225,2.8)
  oval 0.55x1.45 smd: 9(-2.8,-4.225) 10(-2,-4.225) 11(-1.2,-4.225) 12(-0.4,-4.225) 13(0.4,-4.225) 14(1.2,-4.225) 15(2,-4.225) 16(2.8,-4.225) 25(2.8,4.225) 26(2,4.225) 27(1.2,4.225) 28(0.4,4.225) 29(-0.4,4.225) 30(-1.2,4.225) 31(-2,4.225) 32(-2.8,4.225)
  silkscreen extent -4.35,-3.1 3.1,3.75, body extent -4.5,-4.5 4.5,4.5, height 1.6
USB_A_FEMALE_SINGLE [mm] "A horizontally oriented, USB type A receptacle."
  round 1.524 hole 0.92: D+(1,2.71) D-(-1,2.71) GND(3.5,2.71) Vcc(-3.5,2.71)
  round 1.524 hole 2.3 paste+2 mask+0.202: Shield(-6.57,0)
  round 1.524 hole 2.3 mask+0.202: Shield(6.57,0)
  silkscreen extent -7.37,-10.67 7.49,4.06, body extent -7.25,-10.67 7.25,3.85, height 7.12
USB_B_FEMALE_RT [mm] "USB Type B female receptacle, right angle"
  round 1.524 hole 0.92: D+(-1.25,0) D-(-1.25,2) GND(1.25,0) Vcc(1.25,2)
  round 1.524 hole 2.3 mask+0.204: Shield(-6.025,-2.71) Shield(6.025,-2.71)
  silkscreen extent -6.02,-12.83 6.02,3.43, body extent -7.24,-12.89 6.02,3.43, height 10.62
uUSB_Padsonly [mm] "MicroUSB Connection - through hole pads only"
  rect 0.4x1.35 smd paste+0 mask+0.102: 1(3.78,5.421) 2(4.43,5.421) 3(5.087,5.421) 4(5.73,5.421) 5(6.38,5.421)
  rrect50% 1.2x1.9 hole 1.3: shield(0.905,2.635) shield(9.255,2.635)
  rrect100% 1.15x1.05 hole 0.75 paste+0: shield(2.855,5.755)
  rrect100% 1.15x1.05 hole 0.75: shield(7.305,5.755)
  Component Side region: 5.33,1.685 7.13,1.685 7.13,3.585 5.33,3.585
  Component Side region: 3.03,1.685 4.83,1.685 4.83,3.585 3.03,3.585
  Component Side region: 0.53,1.685 2.43,1.685 2.43,3.585 0.53,3.585
  Component Side region: 9.63,3.585 7.73,3.585 7.73,1.685 9.63,1.685
  silkscreen extent 9.91,6.68 10.08,6.68, body extent 1.33,0 8.83,5.59, height 3
V24C48C50BL_tht [mil] "THT V24C48C50BL footprint"
  oval 59.06x60 hole 97: 1(1125,2140) 2(850,2140) 3(600,2140) 4(325,2140) 5(325,140) 7(1125,140)
  oval 59.06x60 hole 97 paste+5: 6(725,140)
  round 59.06 hole 129 paste+5 mask+20: BASE(90,1850) BASE(1360,490) BASE(1360,1140)
  round 59.06 hole 129 mask+20: BASE(90,1140) BASE(90,490) BASE(1360,1790)
  Multi-Layer circle w30: c725,140 r60
  Multi-Layer circle w30: c1125,140 r60
  Multi-Layer circle w30: c325,140 r60
  Multi-Layer circle w30: c850,2140 r60
  Multi-Layer circle w30: c325,2140 r60
  Multi-Layer circle w30: c1125,2140 r60
  Multi-Layer circle w30: c600,2140 r60
  Multi-Layer circle w30: c1360,1140 r75
  Multi-Layer circle w30: c90,1850 r75
  Multi-Layer circle w30: c1360,490 r75
  Multi-Layer circle w30: c90,1140 r75
  Multi-Layer circle w30: c90,490 r75
  Multi-Layer circle w30: c1360,1790 r75
  silkscreen extent -25,-25 1475,2300, body extent 0,5 1450,2285, height 525
XAL6020-112ME_ [mm] "Precision Wire Wound Inductor, 2-Leads, Body 6.36x6.56mm, IPC Medium Density"
  rect 1.43x5.5 smd: 1(-2.02,0) 2(2.02,0)
  silkscreen extent -3.3,-3.4 3.3,3.4, body extent -3.28,-3.28 3.28,3.28, height 2.2
XTAL_ECS-160-10-37-RWM-TR [mm]
  rect 0.85x0.75 smd: 1(-0.675,-0.525) 2(0.675,-0.525) 3(0.675,0.525) 4(-0.675,0.525)
  silkscreen extent -1.8,-0.55 -1.6,-0.35, body extent -0.97,-0.8 1.03,0.8, height 0.55

## Part data
C100: library part CAA572C0G2J204J640LH, "0.2uF capacitor, high voltage", Supplier Part Number 1=445-180360-1-ND, Supplier 1=Digi-Key
C101: library part C1808C681KHRACTU, "680pF Cap for EMI suppresion on 5V regulator", Supplier Part Number 1=80-C1808C681KHR, Supplier 1=Mouser
C103: library part CNA6P1X7R1H106K250AE, "10 uF Capacitor for EMI supression on 5V regulator", Supplier Part Number=C2012X8L1A106K125AE, Supplier Part Number 1=810-CNA6P1X7R1H106K2, Supplier 1=Mouser
C109 C110: library part TMK107BLD105KA-T, Supplier Part Number 1=963-TMK107BLD105KA-T, Supplier 1=Mouser
C111 C112 C114 C115: library part CGA3E2X8R2A472K080AE, "4.7nF soft terminated MLCC capacitor for 48V emi filtering", Supplier Part Number 1=810-CGA3E2X8R2A472KA, Supplier 1=Mouser
C200 C201: library part C0603C101K8HAUTO, "100pF Cap for IC Vcc Smoothing", Supplier Part Number 1=80-C0603C101K8HAUTO, LatestRevisionDate=29-May-2009, LatestRevisionNote="IPC-7351 Footprint Added.", PackageDescription="Chip Capacitor", PackageReference=C1206, Published=8-Jun-2000, Publisher="Altium Limited", Supplier 1=Mouser
C202 C203: "100uF, USB Power smoothing capacitor, tantalium, low ESR", Supplier Part Number 1=478-12526-1-ND, LatestRevisionDate=29-May-2009, LatestRevisionNote="IPC-7351 Footprint Added.", PackageDescription="Chip Capacitor", PackageReference=C0805, Published=8-Jun-2000, Publisher="Altium Limited", Supplier 1=Digi-Key
C204 C205 C206 C207 C208 C209: library part C0805X220K3GACAUTO, "22pF USB Filter Capacitor", Supplier Part Number 1=399-19450-1-ND, LatestRevisionDate=29-May-2009, LatestRevisionNote="IPC-7351 Footprint Added.", PackageDescription="Chip Capacitor", PackageReference=C1206, Published=8-Jun-2000, Publisher="Altium Limited", Supplier 1=Digi-Key
C300: library part GCM219R71C204JA37J, Supplier Part Number 1=81-GCM219R71C204JA7J, LatestRevisionDate=29-May-2009, LatestRevisionNote="IPC-7351 Footprint Added.", PackageDescription="Chip Capacitor", PackageReference=C1206, Published=8-Jun-2000, Publisher="Altium Limited", Supplier 1=Mouser
C400 C401 C402 C406 C407: library part LMK107BJ225KK-T, "2.2uF Capacitor, Non Polarized Chip Cap", Supplier Part Number 1=963-LMK107BJ225KK-T, Supplier 1=Mouser
C403 C404 C405 C408 C409 C410: library part TMK107BJ104KA-T, "0.1uF capacitor, Non Polarized Chip Cap", Supplier Part Number 1=963-TMK107BJ104KA-T, Supplier 1=Mouser
C500 C501 C502: library part C2012X8L1A106K125AE, "10 uF Capacitor", Supplier Part Number=C2012X8L1A106K125AE
D300 D301: "Surface Mount TVS Diode, 17 A Ipp, -55 to 150 degC, 3-Pin SOT23, RoHS, Tape and Reel", Capacitance @ Frequency=75pF@1MHz, Current - Peak Pulse (10/1000µs)=17A(8/20µs), Manufacturer=Bourns, Operating Temperature=-55degC~150degC(TJ), Package / Case=TO-236-3,SC-59,SOT-23-3, Package Description="3-Lead Small Out-Line Transistor, Body 2.9x1.3mm, Pitch 0.95mm", Power - Peak Pulse=400W, Power Line Protection=No, Standard Package=1, Supplier Device Package=SOT-23-3, Voltage - Breakdown (Min)=7.5V,13.3V, Voltage - Clamping (Max) @ Ipp=14V,26V, Voltage - Reverse Standoff (Typ)=7V(Max),12V(Max), Applications=GeneralPurpose, Bidirectional Channels=2, Catalog Drawings=CDSOT23-SM712Schematic, Category=CircuitProtection, Datasheet URL=https://datasheet.ciiva.com/11193/cdsot23-sm712-11193846.pdf, Datasheet Version=Aug-12, Family=TVS-Diodes, For Use With=EVAL-CN0313-SDPZ-ND-EVALEMCRS-485CERTIFIED, Kits=PN-DESIGNKIT-22-ND-KITESD/EFTSURGEPROTECTION, Manufacturer URL=http://www.bourns.com/, Mounting Type=SurfaceMount, Online Catalog=CDSOT23Series, Other Names=CDSOT23-SM712CT, Packaging=CutTape(CT), Product Training Modules=ESDProtectionProducts, Related Products=ADM3485EARZ-REEL7TR-ND-ICTXRXRS-485HS3.3V8SOICADM3485EARZ-REEL7CT-ND-ICTXRXRS-485HS3.3V8SOICADM3485EARZ-REEL7DKR-ND-ICTXRXRS-485HS3.3V8SOICADM3485EARZ-ND-ICTX/RXRS-485HS3.3V8-SOICADM3485EAR-ND-ICTX/RXRS-485HS3.3V8-SOIC296-38503-5-ND-ICTXRXRS4853.3VESD14SOIC296-38501-5-ND-ICRS485TXRX3.3ESD8SOIC296-38522-5-ND-ICTXRXRS4853.3V14SOIC296-38502-5-ND-ICTXRXRS4853.3VESD14SOICADM3485EARZ-REELTR-ND-ICTXRXRS-4853.3V8SOICADM3485EARZ-REELCT-ND-ICTXRXRS-4853.3V8SOICADM3485EARZ-REELDKR-ND-ICTXRXRS-4853.3V8SOIC296-40517-2-ND-ICTXRXRS4853.3V14SOIC296-40517-1-ND-ICTXRXRS4853.3V14SOIC296-40517-6-ND-ICTXRXRS4853.3V14SOIC296-40519-2-ND-ICRS485TXRX3.3ESD8SOIC296-40519-1-ND-ICRS485TXRX3.3ESD8SOIC296-40519-6-ND-ICRS485TXRX3.3ESD8SOIC296-40524-2-ND-ICTXRXRS4853.3VESD8SOIC296-40524-1-ND-ICTXRXRS4853.3VESD8SOIC296-40524-6-ND-ICTXRXRS4853.3VESD8SOIC296-40522-2-ND-ICTXRXRS4853.3VESD14SOIC296-40522-1-ND-ICTXRXRS4853.3VESD14SOIC296-40522-6-ND-ICTXRXRS4853.3VESD14SOIC296-40529-2-ND-ICRS485TXRX3.3ESD8SOIC296-40529-1-ND-ICRS485TXRX3.3ESD8SOIC2, Series=-, Type=Zener, Unidirectional Channels=-
D400 D500 D502 D504: "1A Schottky Diode", Supplier Part Number 1=511-STPS1L40ZF, Supplier 1=Mouser
J1: "AMP-LATCH Universal Headers - 26 Pos", Supplier Part Number 1=AHK26H-ND, Supplier 1=Digi-Key
J100: "2 pin molex connector for connecting laser to 48Vdc"
J200: "USB Type B female connector.", Supplier Part Number 1=380-1492-ND, Supplier 1=Digi-Key, USB Type="Type B"
J201 J202: "USB Type A female connector.", Supplier Part Number 1=732-10012-ND, Supplier 1=Digi-Key, USB Type="Type A"
J400 J402: library part Hole_25mil, "40 mil solder pad - 25 mil hole"
J401: library part uUSB_Padsonly, "Micro USB Connection - solder pads only", Supplier Part Number 1=710-629105150921, Supplier 1=Mouser
J500: library part HeaterConnector, "Symbolic schematic symbol showing the inductance and resitance of the heaters"
L100: library part XAL6020-112MEB, "1.1uH inductor for EMI suppresion on 5V regulator", Supplier Part Number 1=994-XAL6020-112MEB, Supplier 1=Mouser
L400 L401: library part BLM21SP601SH1D, "Ferrite Bead, 600 Ohm Impedence for TLC", Supplier Part Number 1=81-BLM21SP601SH1D, Supplier 1=Mouser
LED400: "LED", Manufacturer_Name="ROHM Semiconductor", Height=0.9mm, Manufacturer_Part_Number=SML-211DTT86
M103: "N-MOSFET for logic level switching", Supplier Part Number 1=771-2N7002NXAKR, Supplier 1=Mouser
M500 M501 M502: library part SQJ208EP-T1_GE3, "Two NPN Power Transistors for heater power control", Supplier Part Number 1=78-SQJ208EP-T1_GE3, Supplier 1=Mouser
P8 P9: library part HDR_46_F_2_0.1_0.1, "2x23 Female Pin header, 2.54mm, gold plated", Color=Black, Manufacturer="Sullins Connector Solutions", Manufacturer Part Number=PPPC232LFBN-RC, Supplier Part Number 1=SAM1196-23-ND, Category="Connectors, Interconnects", ComponentLink1Description=http://www.sullinscorp.com/drawings/78_P(N)PxCxxxLFBN-RC,_10492-G.pdf, ComponentLink1URL=http://www.sullinscorp.com/drawings/78_P(N)PxCxxxLFBN-RC,_10492-G.pdf, Connector Type=Header, Contact Finish=Gold, Contact Finish Thickness=Flash, Contact Type="Female Socket", Fastening Type=-, Features=-, Mounting Type="Through Hole", Number of Positions=46, Number of Positions Loaded=All, Number of Rows=2, Packaging=Bulk, Pitch="0.100\" (2.54mm)", Pricing 1="1=2.75, 10=2.325, 25=2.2196, 50=2.0084, 100=1.7969, 250=1.58552, 500=1.4798, 1000=1.3741, 2500=1.32125 (USD)", RoHS="RoHS Compliant", Row Spacing="0.100\" (2.54mm)", Stock 1=750, Supplier 1=Digi-Key, Termination=Solder
P400: "Header, 2-Pin", LatestRevisionDate=17-Jul-2002, LatestRevisionNote="Re-released for DXP Platform.", Publisher="Altium Limited"
R1 R2 R3 R4 R5 R6 R7 R8 R9: library part RN731JTTD1002F10, "10K resistor, Thermister Pullup Resistor", Supplier Part Number 1=660-RN731JTTD1002F10, LatestRevisionDate=29-May-2009, LatestRevisionNote="IPC-7351 Footprint Added.", PackageDescription="Chip Resistor", PackageReference=J1-0603, Published=8-Jun-2000, Publisher="Altium Limited", Supplier 1=Mouser
R200 R201 R202 R203 R204 R205: library part CR0805-FX-27R0ELF, "27Ohm Resitor, USB Terminating Resistor", Supplier Part Number 1=652-CR0805FX-27R0ELF, LatestRevisionDate=29-May-2009, LatestRevisionNote="IPC-7351 Footprint Added.", PackageDescription="Chip Resistor", PackageReference=J1-0603, Published=8-Jun-2000, Publisher="Altium Limited", Supplier 1=Mouser
R206 R207 R208 R209: library part CRCW060315K0JNEAC, "15KOhm Resistor, for USB pull down", Supplier Part Number 1=541-15KGCT-ND, LatestRevisionDate=29-May-2009, LatestRevisionNote="IPC-7351 Footprint Added.", PackageDescription="Chip Resistor", PackageReference=J1-0603, Published=8-Jun-2000, Publisher="Altium Limited", Supplier 1=Digi-Key
R210: library part ERJ-S03D1501V, "1.5KOhm Resistor, for USB pull up", Supplier Part Number 1=667-ERJ-S03D1501V, LatestRevisionDate=29-May-2009, LatestRevisionNote="IPC-7351 Footprint Added.", PackageDescription="Chip Resistor", PackageReference=J1-0603, Published=8-Jun-2000, Publisher="Altium Limited", Supplier 1=Mouser
R300 R302 R303 R304: library part SR732BTTE10R0F, "10 Ohm Resistor, RS-422 shockproof resistor", Supplier Part Number 1=660-SR732BTTE10R0F, LatestRevisionDate=29-May-2009, LatestRevisionNote="IPC-7351 Footprint Added.", PackageDescription="Chip Resistor", PackageReference=J1-0603, Published=8-Jun-2000, Publisher="Altium Limited", Supplier 1=Mouser
R301 R305: library part SR0805FR-47100RL, "100 Ohm resistor, RS422 Terminating Resistor", Supplier Part Number 1=YAG5845CT-ND, LatestRevisionDate=29-May-2009, LatestRevisionNote="IPC-7351 Footprint Added.", PackageDescription="Chip Resistor", PackageReference=J1-0603, Published=8-Jun-2000, Publisher="Altium Limited", Supplier 1=Digi-Key
R400 R403: library part CRGP0603F470R, "470 Ohm Generic Chip Resistor", Supplier Part Number 1=279-CRGP0603F470R, Supplier 1=Mouser
R401 R402: library part CRCW060333R0FKEAC, "33 Ohm Generic Chip Resistor", Supplier Part Number 1=71-CRCW0603-33-E3, Supplier 1=Mouser
R500 R501 R502: "100 Ohm Resistor", Supplier Part Number 1=541-100HCT-ND, Supplier 1=Digi-Key
RT1: "NTC Thermisters to monitor temperature of box. On PCB this will be a pin header."
U1: library part SN74AHC1G14DCK3, "Inverter, single gate", Manufacturer_Name="Texas Instruments", Datasheet Link=https://www.arrow.com/en/products/sn74ahc1g14dck3/texas-instruments, Height=1.1mm, Manufacturer_Part_Number=SN74AHC1G14DCK3
U2: library part SN74HC244A, "Tristate buffer for protecting the BBB during power down.", Supplier Part Number 1=595-SN74HC244APWR, IC Family=SN74HC244A, Supplier 1=Mouser
U200: "USB 2.0 Hub IC", Manufacturer="Texas Instruments", Manufacturer_Part_Number=tusb2046b_vf_32, PACKAGE_DESIGNATOR=VF, Supplier Part Number 1=296-48218-1-ND, Datasheet_URL=http://www.ti.com/lit/gpn/TUSB2046B, FAMILY_NAME="USB HUB CONTROLLER", GENERIC_PART_NUMBER=TUSB2046B, INDUSTRY_STD_PKG_TYPE=LQFP, PIN_COUNT=32, RefDes=RefDes, Supplier 1=Digi-Key, Type=Type, Vendor="Texas Instruments"
U201 U202: library part CMP-0326-00072-3, "Universal Serial Bus Port Transient Suppressor, 4 Channels, -40 to +85 degC, 8-pin TSSOP (PW), Green (RoHS & no Sb/Br)", Breakdown Voltage(Min)(V)=7, IO Capacitance(Typ)(pF)=35, IO Leakage Current(nA)=1000, Manufacturer="Texas Instruments", ComponentLink1Description="Manufacturer URL", ComponentLink1URL=http://www.ti.com/, ComponentLink2Description=Datasheet, ComponentLink2URL=http://www.ti.com/general/docs/lit/getliterature.tsp?genericPartNumber=SN65240&fileType=pdf, ComponentLink3Description="URL Link1", ComponentLink3URL=SamplesURL:http://www.ti.com/product/sn65240#samples, DatasheetVersion=SLLS266G, Eco-Plan="Pb-Free (RoHS)", Mounting Technology="Surface Mount", PackageDescription="8-Pin Plastic Thin Small Outline Package 3 x 4.4 mm Body ,0.65 mm Pitch", PackageReference=PW0008A, PackageVersion="revG, Feb-2011", PartNumber=SN65240PWR, SubFamily="ESD Solution", USB Full Speed=TRUE
U300: "RS-422 line driver IC", Supplier Part Number 1=296-40501-1-ND, Supplier 1=Digi-Key
U401: "MCU 32-bit Kinetis K20 ARM Cortex M4 RISC 256KB Flash 1.8V/2.5V/3.3V 64-Pin LQFP Tray", Package="LQFP-64 Freescale Semiconductor", Supplier Part Number 1=841-MK20DX256VLH7, Availability=Unavailable, MF="NXP USA", MP=MK20DX256VLH7, Price=None, SnapEDA_Link=https://www.snapeda.com/parts/MK20DX256VLH7/NXP%20USA%20Inc./view-part/?ref=snap, Supplier 1=Mouser
U402: "Bootloader chip for teensy 3.2", Part Number=MKL04Z32
U500 U501 U502: library part CMP-0479-00408-1, "Single and Dual Micropower High Side Switch Controller, 1.8 to 5.5 V Vin, 5-pin SOT23 (S5-5), -40 to 85 degC, Pb-Free, Mini Tape and Reel", Manufacturer="Linear Technology", ComponentLink1Description="Manufacturer URL", ComponentLink1URL=http://www.linear.com/, ComponentLink2Description=Datasheet, ComponentLink2URL=http://cds.linear.com/docs/en/datasheet/19812fs.pdf, ComponentLink3Description="Package Specification", ComponentLink3URL=http://cds.linear.com/docs/en/datasheet/17278fb.pdf, Mounting Technology="Surface Mount", PackageDescription="5-Pin Plastic SOT-23, Body 1.625 x 2.90 mm, Pitch 0.95 mm", PackageReference=S5-5, PackageVersion=Aug-07, Packing="Mini Tape and Reel", PartNumber=LTC1981ES5#TRMPBF, RoHS=TRUE
VR100: library part "THN 10-2411WIR", "28V to 5V converter", ComponentLink1Description=Datasheet, ComponentLink1URL=https://www.mouser.com/datasheet/2/687/thn10wir-datasheet-1695877.pdf, Manufacture Part No="THN 10-2411WIR", Supplier 1=Digi-Key
VR101: "28V to 48V converter, 50W", Supplier Part Number 1=492-V24C48C50BL, Supplier 1=Mouser
VR103 VR400: library part CMP-0062-00443-4, "500mA Low Dropout CMOS Linear Regulators Stable with Ceramic Output Capacitors, 3-pin TO-252, Pb-Free, 75 Rail", Manufacturer="Texas Instruments", PackageTopMarking=NSUZXYTT*LP38691*DT-3.3, PowerWise=Y, Code_JEDEC=TO-252-AA, ComponentLink1Description="Datasheet URL", ComponentLink1URL=http://www.ti.com/general/docs/lit/getliterature.tsp?genericPartNumber=LP38691&fileType=pdf, CompType="LDO IC", High-Reliability=Y, PackageDescription="TO252, Molded, Jedec, 6.8 x 6.10 x 2.30mm Body, 3 Lead, 2.28mm Pitch, Surface Mount", PackageReference=NDP0003B, PartNumber=LP38691DT-3.3/NOPB, PinCount=3, RoHS=Y
Y200: "6MHz Crystal Oscillator for TUSB IC.", Supplier Part Number 1=774-ATS060C-E, LatestRevisionDate=17-Jul-2002, LatestRevisionNote="Re-released for DXP Platform.", PackageDescription="Crystal, Thru-Hole; 2 Leads; Body 3.1 x 8.2 mm (Dia.xH)", PackageReference=R38, Published=8-Jun-2000, Publisher="Altium Limited", Supplier 1=Mouser
Y400: "Crystal 16MHz", Package="SMD-4 ECS International", Supplier Part Number 1=520-160-10-37-RWM-T, Digi-Key_Part_Number=XC2119CT-ND, Digi-Key_Purchase_URL=https://www.digikey.com/product-detail/en/ecs-inc/ECS-160-10-37-RWM-TR/XC2119CT-ND/5875603?utm_source=snapeda&utm_medium=aggregator&utm_campaign=symbol, MF="ECS Inc.", MP=ECS-160-10-37-JTN-TR, SnapEDA_Link=https://www.snapeda.com/parts/ECS-160-10-37-RWM-TR/ECS%20Inc./view-part/?ref=snap, Supplier 1=Mouser

## Via types
v1: diameter 20, hole 10, Component Side to Solder Side, 183 vias
v2: diameter 20, hole 8, Component Side to Solder Side, 22 vias

## Nets (pads, with @x,y where several pads share a name; then routed paths per layer and width w, separated by ;. In a path a pad name is that pad's centre, name@x,y a point inside that pad or via, vN(x,y) a via of type N, cw(c..) or ccw(c..) an arc to the next point about the centre after c; other vN are vias at no path point)
3V3: C109.2 C200.2 C201.1 C300.1 R210.2 U1.5 U2.20 U200.3 U200.18 U200.22 U200.25 U200.26 U300.4 U300.13 U300.14 VR103.1 | length 1319.9
  Component Side w10: C109.2@2211.3,2269.09 2225,2255.39 C109.2@2225,2252.44 C109.2@2227.56,2255 ; U1.5@2300,2460 2338.62,2460 2353.62,2445 v1(2355,2445) ; U2.20@2767.8,2310.16 2767.87,2310.08 2820.45,2310.08 2820.45,2314.44 2829.15,2323.14 v1(2829.15,2325.99)
  Component Side w20: VR103.1@1874.76,2416.26 1976.3,2416.26 2137.56,2255 2222.44,2255 C109.2@2225,2252.44 ; C109.2@2227.56,2255 v1(2285,2255) ; v1(2825,1025) U200.18@2825,1100 ; C201.1@2888.54,1525 2935,1525 2950,1510 v1(2950,1507.5) 2950,1433.66 U200.3@2950.98,1432.68 ; v1(2910,2195) U300.4@2973.78,2195 ; v1(2950,1030) 2950.98,1030.98 U200.22@2950.98,1100 ; U200.26@3070.08,1187.6 U200.25@3070.08,1156.1 3070.4,1155.79 3114.21,1155.79 v1(3115,1155) 3118.54,1155 3140,1133.54 C200.2@3140,1105 ; R210.2@3108.54,1530 3108.54,1486.46 v1(3110,1485) ; C300.1@3195,2440 3195.61,2439.39 v1(3195.61,2385) 3195.61,2345.61 U300.14@3196.22,2345 U300.13@3196.22,2295
+5: C110.2 C202.1 C203.1 C500.2 C501.2 C502.2 J201.Vcc J202.Vcc P9.5 P9.6 P400.2 U500.5 U501.5 U502.5 VR100.3 VR103.3 | length 12537.3
  Component Side w10: VR103.3@1693.98,2415 VR103.3@1695.24,2416.26 1695.24,2502.8 C110.2@1697.44,2505 ; C500.2@1920,2979.13 1924.13,2975 v1(2000,2975) 2001.2,2973.8 2046.56,2973.8 U500.5@2047.76,2972.6 ; C501.2@1920,3330 C501.2@1935,3330 v1@1995,3330 ; v1(2000,3330) 2001.2,3328.8 2046.56,3328.8 U501.5@2047.76,3327.6
  Component Side w15: P9.5@1612.89,2707.11 1612.89,2775 1650,2775 1849.06,2974.06 1914.92,2974.06 C500.2@1920,2979.13 ; C502.2@1975,3729.06 1975.47,3729.53 2047.28,3729.53 U502.5@2047.76,3730 2047.76,3693.6 v2(2048.32,3693.04)
  Component Side w20: v1(1615,2415) VR103.3@1693.98,2415
  Component Side w50: J202.Vcc@271.69,757.8 272.8,758.9 458.9,758.9 C203.1@460,760 v1(638.33,760) v1(675,760) ; J201.Vcc@606.69,3062.8 607.24,3063.35 759.45,3063.35 C202.1@760,3063.9 881.1,3063.9 950,2995 950,2675 1210,2415 v1(1615,2415) v1(1615,2378.33) 1615,2375 v1(1615,2305) ; P9.5@1612.89,2707.11 P9.5@1615,2705
  Solder Side w15: v1(2000,2975) v1(2000,3330) 2000,3532.77 1999.37,3533.4 2048.32,3582.35 v2(2048.32,3693.04)
  Solder Side w20: 1615,2275 1619.29,2270.71
  Solder Side w50: P400.2@245,3925 490,3680 490,3455 606.69,3338.31 J201.Vcc@606.69,3062.8 ; v1(565,760) v1@635,760 ; v1(638.33,760) v1(675,760) 680,760 965,1045 1395,1045 1615,1265 1615,1405 ; P9.5@1615,2705 P9.6@1615,2605 v1(1615,2415) v1(1615,2341.67) 1615,2275 1615,1405 ; VR100.3@3170,3795 3715,3250 3715,2849.36 3970.11,2594.25 3970.11,2465.75 3879.25,2374.89 3750.75,2374.89 3620.64,2505 3500,2505 3345,2350 3345,1575 3065,1295 2290,1295 2185,1400 1620,1400 1615,1405
  other v1: 601.67,760
+28: C100.2 C103.2 C112.1 D500.C D502.C D504.C J1.7 J1.8 J1.9 J500.2 J500.4 J500.6 L100.1 VR101.1 | length 9355.8
  Component Side w25: J500.2@2700,3265 2705,3270 2760,3270 2775,3255 D500.C@2870,3255 ; J500.4@2700,3465 2785,3465 2794.76,3474.76 D502.C@2870,3474.76
  Component Side w40: v1(2550,4380) C100.2@2725,4380
  Component Side w47.24: J500.6@2700,3665 2755,3665 2782.76,3692.76 D504.C@2870,3692.76 2910,3732.76 2910,3965.6 3040,4095.6 3764.4,4095.6 3900,3960 4235,3960 4420,3775 4420,3652.82 L100.1@4422.81,3650 ; J1.7@4405,1125 4495,1215 4495,1226.58 ; J1.9@4405,1225 4406.58,1226.58 4495,1226.58 ; L100.1@4424.53,3650 4424.53,3346.71 4424.06,3346.24 4424.06,3297.95 C103.2@4421.1,3295 4421.1,3124.72 4330,3033.62 4330,2418.68 4495,2253.68 4495,1226.58
  Component Side w50: C112.1@1185,5732.56 1185,5735 1240,5790 1355,5790 1411.53,5790 VR101.1@1413.27,5788.27
  Solder Side w47.24: J1.8@4305,1125 J1.7@4405,1125 J1.9@4405,1225
  Solder Side w50: 1415,5730 1415,5666.32 1865,5216.32 1865,4990 2475,4380 v1(2550,4380) 2550,4140 2605,4085 2605,3760 J500.6@2700,3665 2703.24,3661.76 2775.71,3661.76 2805,3632.47 2805,3470 ; J500.2@2700,3265 2703.24,3268.24 2775.71,3268.24 2805,3297.53 2805,3470 ; J500.4@2700,3465 2703.24,3468.24 2803.24,3468.24 2805,3470
+48: C114.2 J100.1 VR101.7 | length 2394
  Component Side w25: VR101.7@3415,5790 3457.43,5747.57 3500,5705 3615.36,5705 3623.8,5696.56 3623.8,5663.76 C114.2@3630,5657.56
  Solder Side w50: J100.1@3190,4235 3440,4235 3710,4505 3710,5710 3630,5790 3475,5790